# Altium PCB power_adapter_icarus.PcbDoc
Units mil, origin at the board's own origin, x right, y up, seen from the top; angles counter-clockwise.
Board outline 5250 x 2929.55 mil, 2 copper layers (Top Layer, Bottom Layer); 38 components, 8 nets, 120 pads, 4 vias.
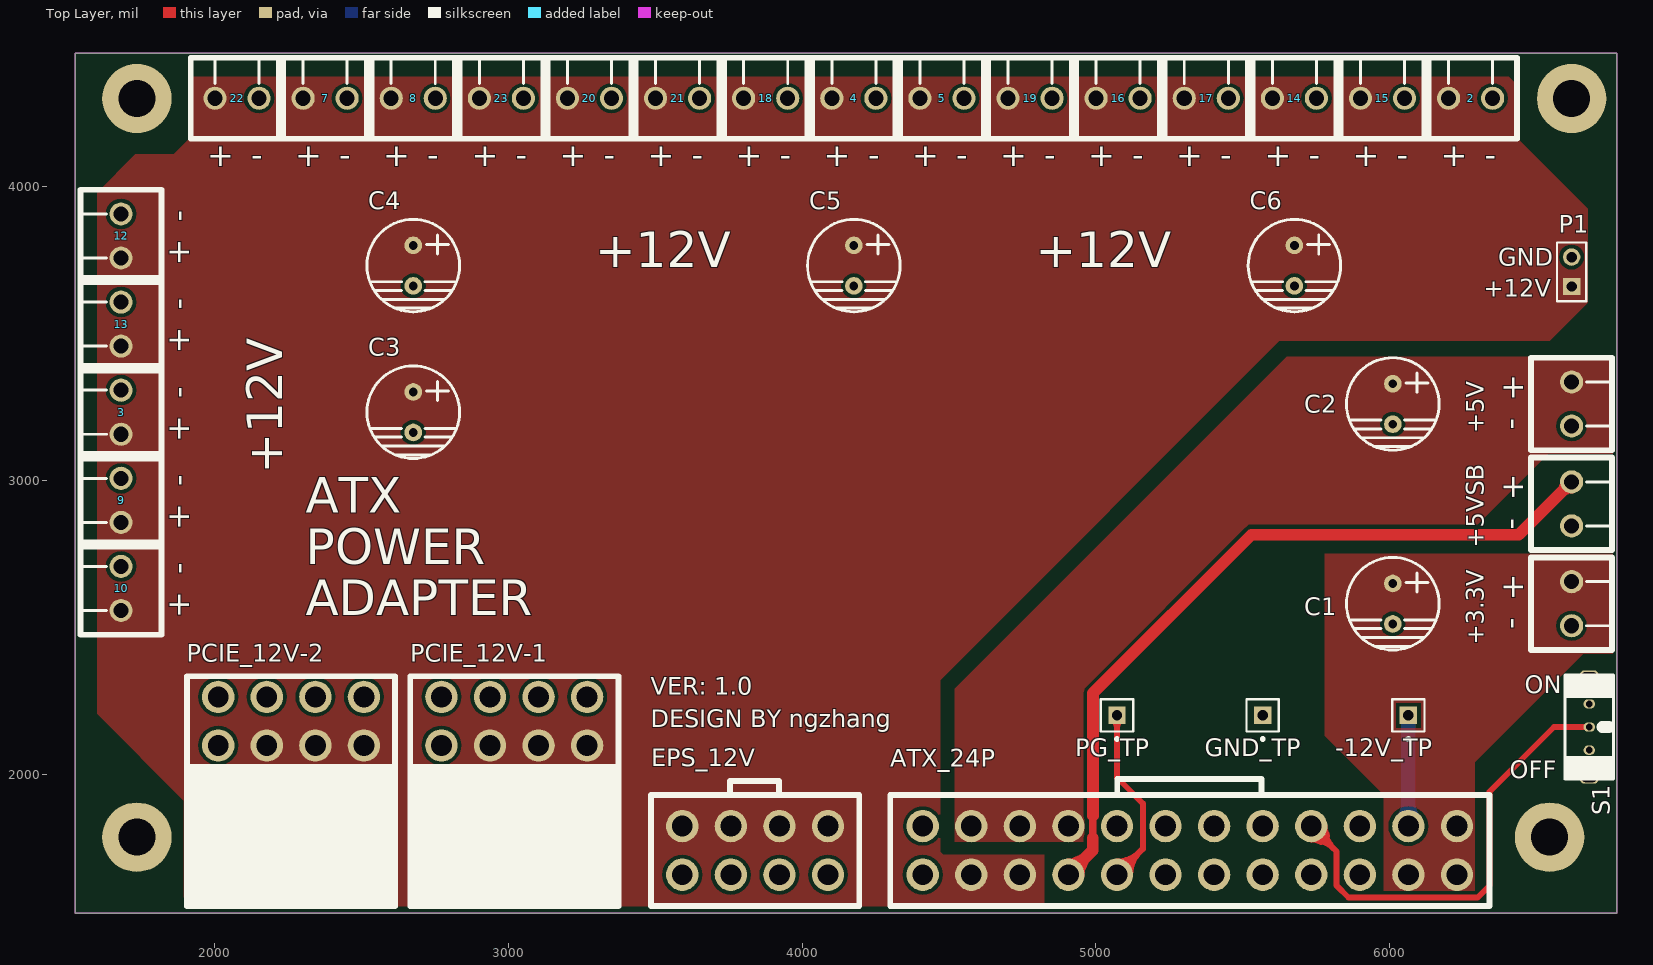
[diagram p0: Top Layer view]
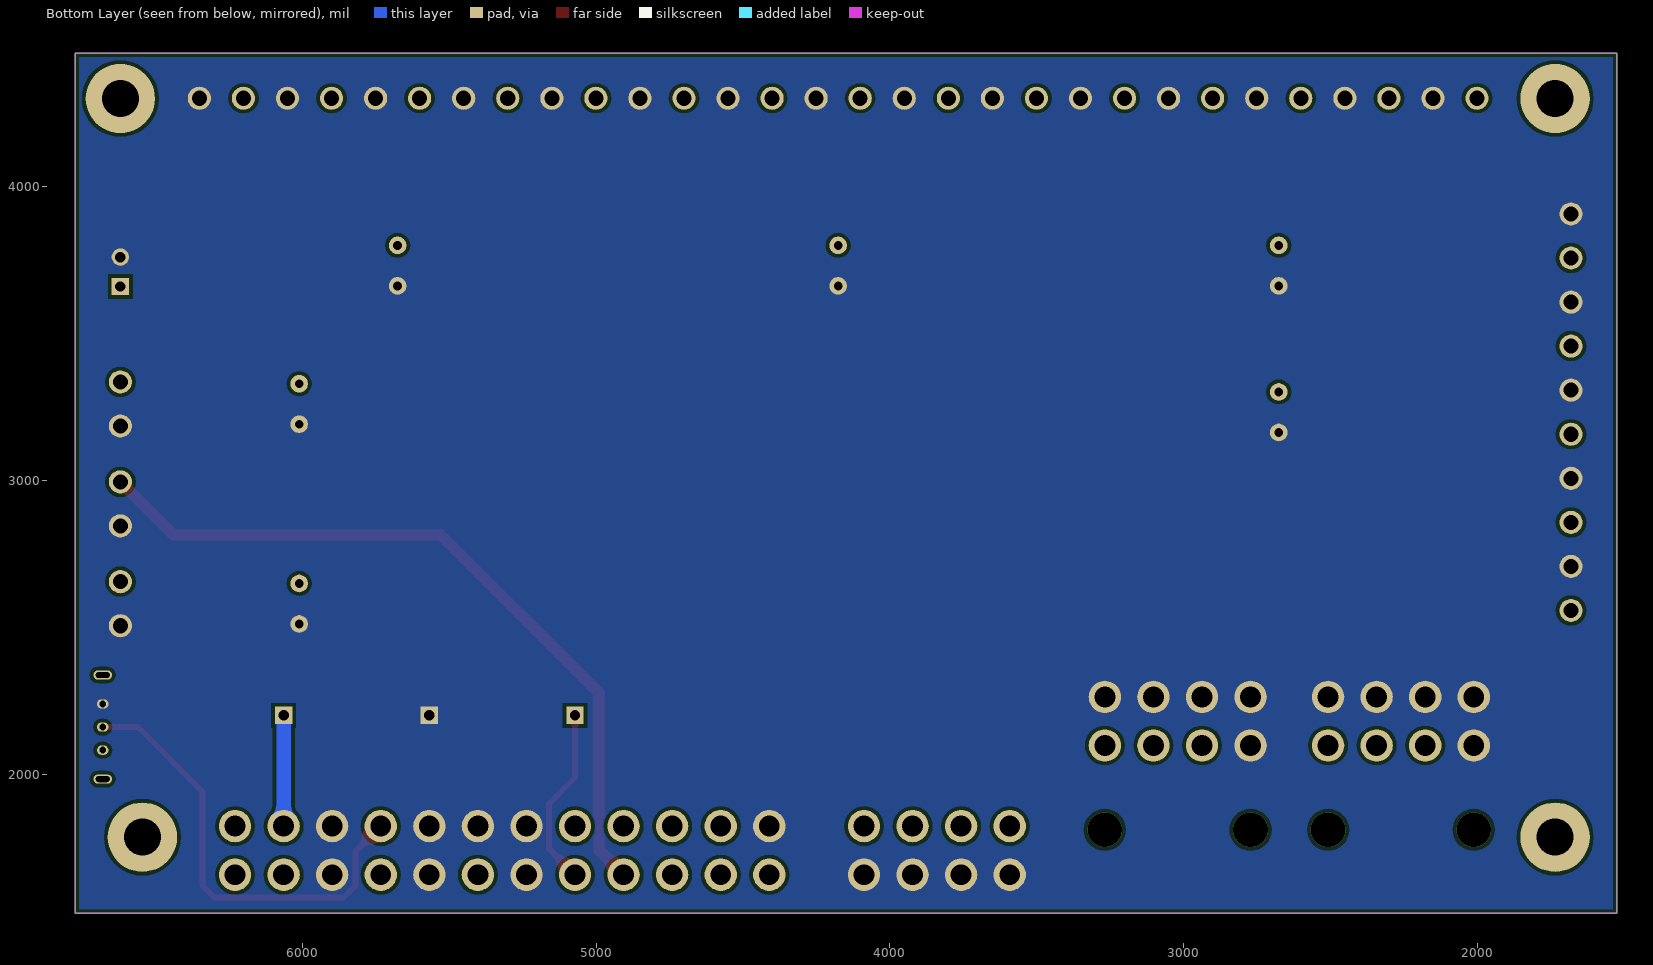
[diagram p1: Bottom Layer view, seen from below]

## Layer stack, top to bottom
Top Layer: signal copper 1.4
Dielectric: dielectric 12.6, FR-4, Dk 4.8
Bottom Layer: signal copper 1.4

## Board outline
1524.39,1525.45 1524.39,4455 6774.39,4455 6774.39,1525.45

## Design rules (kind name [scope] priority, off if disabled: settings)
Clearance [All] p1: gap=12
ComponentClearance [All] p1 off: gap=10 collisioncheckmode=3 verticalgap=10 showdistances=FALSE
HoleSize [All] p1: absolutevalues=TRUE maxlimit=10000 minlimit=1 maxpercent=80.000 minpercent=20.000
PlaneConnect [All] p1: planeconnectstyle=Direct reliefexpansion=20 reliefentries=4 reliefconductorwidth=10 reliefairgap=10
PolygonConnect [All] p1: connectstyle=Direct reliefconductorwidth=10 reliefentries=4 polygonreliefangle="90 Angle"
RoutingVias [All] p1: holewidth=28 width=50 viastyle="Through Hole" minholewidth=28 minwidth=50 maxholewidth=2800 maxwidth=5000
SilkscreenOverComponentPads [All] p1: minsilkscreentomaskgap=10
SolderMaskExpansion [All] p1: expansion=4
Width [All] p1: maxlimit=1000 minlimit=10 preferedwidth=10 minimp=50.000000 maximp=50.000000 favimp=50.000000
24 further rules are at their usual default settings.

## Components (designator, comment, footprint, x,y, rotation, side; value= is the part's Value field where it differs from the comment)
2 "Header 2" EU_2PIN 6276,4301 r0 top
3 "Header 2" EU_2PIN 1681,3232 r90 top
4 "Header 2" EU_2PIN 4176,4301 r0 top
5 "Header 2" EU_2PIN 4476,4301 r0 top
7 "Header 2" EU_2PIN 2376,4301 r0 top
8 "Header 2" EU_2PIN 2676,4301 r0 top
9 "Header 2" EU_2PIN 1681,2932 r90 top
10 "Header 2" EU_2PIN 1681,2632 r90 top
12 "Header 2" EU_2PIN 1681,3832 r90 top
13 "Header 2" EU_2PIN 1681,3532 r90 top
14 "Header 2" EU_2PIN 5676,4301 r0 top
15 "Header 2" EU_2PIN 5976,4301 r0 top
16 "Header 2" EU_2PIN 5076,4301 r0 top
17 "Header 2" EU_2PIN 5376,4301 r0 top
18 "Header 2" EU_2PIN 3876,4301 r0 top
19 "Header 2" EU_2PIN 4776,4301 r0 top
20 "Header 2" EU_2PIN 3276,4301 r0 top
21 "Header 2" EU_2PIN 3576,4301 r0 top
22 "Header 2" EU_2PIN 2076,4301 r0 top
23 "Header 2" EU_2PIN 2976,4301 r0 top
+3.3V "Header 2" EU_2PIN 6620,2580 r270 top
+5V "Header 2" EU_2PIN 6620,3260 r270 top
+5VSB "Header 2" EU_2PIN 6620,2920 r270 top
-12V_TP "Socket" PIN1 6064.09,2200 r180 top
ATX_24P "P1" ATX_24P 5320,1740 r180 top locked
C1 "270uF/16V" CAP8X8 6011,2508.9 r0 top
C2 "270uF/16V" CAP8X8 6011,3188.9 r0 top
C3 "270uF/16V" CAP8X8 2676,3160.9 r0 top
C4 "270uF/16V" CAP8X8 2676,3660 r0 top
C5 "270uF/16V" CAP8X8 4176,3660 r0 top
C6 "270uF/16V" CAP8X8 5676,3660 r0 top
EPS_12V "P4" EPS_12V 3840,1740 r0 top
GND_TP "Socket" PIN1 5568.03,2200 r180 top
P1 "12V_TP" HDR1X2 6620,3660 r90 top
PCIE_12V-1 "P3" PCIE_12V 3020,2180 r0 top
PCIE_12V-2 "P2" PCIE_12V 2260,2180 r0 top
PG_TP "Socket" PIN1 5071.97,2200 r180 top
S1 "SW-SPDT" SW3_S 6680,2160 r270 top

## Footprints (in the part's own frame and the unit in brackets; to place one, negate y for a bottom-side part, rotate by r counter-clockwise, add the part's x,y. Pads: shape width x height; smd on the part's side, far side on the other; paste and mask are expansions set on the pad)
ATX_24P [mm]
  round 2.8 hole 1.8: 1(-23.1,2.1) 2(-18.9,2.1) 3(-14.7,2.1) 4(-10.5,2.1) 5(-6.3,2.1) 6(-2.1,2.1) 7(2.1,2.1) 8(6.3,2.1) 9(10.5,2.1) 10(14.7,2.1) 11(18.9,2.1) 12(23.1,2.1) 13(-23.1,-2.1) 14(-18.9,-2.1) 15(-14.7,-2.1) 16(-10.5,-2.1) 17(-6.3,-2.1) 18(-2.1,-2.1) 19(2.1,-2.1) 20(6.3,-2.1) 21(10.5,-2.1) 22(14.7,-2.1) 23(18.9,-2.1) 24(23.1,-2.1)
  silkscreen extent -25.91,-6.17 25.91,4.8
CAP8X8 [mil]
  round 60 hole 30: 1(0,140) 2(0,2.2)
  silkscreen extent -157,-86 157,229
EPS_12V [mm]
  round 2.8 hole 1.8: 1(6.3,-2.1) 2(2.1,-2.1) 3(-2.1,-2.1) 4(-6.3,-2.1) 5(6.3,2.1) 6(2.1,2.1) 7(-2.1,2.1) 8(-6.3,2.1)
  silkscreen extent -9,-4.8 9,5.99
EU_2PIN [mm]
  round 2 hole 1.3: 1(-1.905,0) 2(1.905,0)
  silkscreen extent -4,-3.5 4,3.5
HDR1X2 [mm] "Connector; Header; 2 Position"
  rect 1.5x1.5 hole 0.9: 1(0,0)
  round 1.5 hole 0.9: 2(2.54,0)
  silkscreen extent -1.27,-1.27 3.81,1.27
PCIE_12V [mm]
  round 2.8 hole 1.8: 1(6.3,-2.1) 2(2.1,-2.1) 3(-2.1,-2.1) 4(-6.3,-2.1) 5(6.3,2.1) 6(2.1,2.1) 7(-2.1,2.1) 8(-6.3,2.1)
  silkscreen extent -9.05,-16 9,3.89
PIN1 [mm] "Connector; Plug"
  rect 1.5x1.5 hole 0.9: 1(0,0)
  silkscreen extent -1.4,-1.4 1.4,2.17
SW3_S [mm]
  oval 0.8x1 hole 0.6: 1(-2,0) 2(0,0) 3(2,0)
  oval 0.8x1.6 hole 0.5 slot 1.2 at 90 deg: 4(-4.5,0) 5(4.5,0)
  silkscreen extent -4.57,-2.21 4.57,2.18

## Part data
2 3 4 5 7 8 9 10 12 13 14 15 16 17 18 19 20 21 22 23 +3.3V +5V +5VSB: "Header, 2-Pin"
ATX_24P: library part ATX_24P
C1 C2 C3 C4 C5 C6: library part "Cap Pol3", "Polarized Capacitor (Surface Mount)"
EPS_12V: library part EPS_12V
P1: library part "Header 2", "Header, 2-Pin"
PCIE_12V-1 PCIE_12V-2: library part PCIE_12V
S1: "SPDT Subminiature Toggle Switch, Right Angle Mounting, Vertical Actuation"

## Free pads (board coordinates)
  round 236.22 hole 125.98: 0(1735,1785) 0(1735,4300) 0(6545,1785) 0(6620,4300)

## Via types
v1: diameter 118.11, hole 118.11, Top Layer to Bottom Layer, 4 vias

## Nets (pads, with @x,y where several pads share a name; then routed paths per layer and width w, separated by ;. In a path a pad name is that pad's centre, name@x,y a point inside that pad or via, vN(x,y) a via of type N, cw(c..) or ccw(c..) an arc to the next point about the centre after c; other vN are vias at no path point)
5VSB: +5VSB.1 ATX_24P.9 | length 3119.9
  Top Layer w25: 4989.29,1782.15 4989.29,1857.06
  Top Layer w40: ATX_24P.9@4901.83,1658.3 cw(c4958.09,1646.78) 4943.23,1702.25 ; ATX_24P.9 4989.29,1740 4989.29,1782.15 ; ATX_24P.9@4907.59,1652.54 ccw(c4896.07,1708.8) 4951.54,1693.94 ; 4990,1857.77 4990,2275 5530,2815 6440,2815 +5VSB.1 ; 4966.56,1717.27 cw(c4906.61,1777.22) 4906.61,1692.44 ccw(c4906.61,1777.22) 4966.56,1717.27 ; 4966.56,1717.27 ccw(c5026.52,1657.32) 4941.73,1657.32 cw(c5026.52,1657.32) 4966.56,1717.27 ; 6586.93,2961.93 cw(c6620,2928.87) 6620,2975.63 ccw(c6620,2928.87) 6586.93,2961.93 ; 6586.93,2961.93 ccw(c6553.87,2995) 6600.63,2995 cw(c6553.87,2995) 6586.93,2961.93
GND: 2.2 3.2 4.2 5.2 7.2 8.2 9.2 10.2 12.2 13.2 14.2 15.2 16.2 17.2 18.2 19.2 20.2 21.2 22.2 23.2 +3.3V.2 +5V.2 +5VSB.2 ATX_24P.3 ATX_24P.5 ATX_24P.7 ATX_24P.15 ATX_24P.17 ATX_24P.18 ATX_24P.19 ATX_24P.24 C1.2 C2.2 C3.2 C4.2 C5.2 C6.2 EPS_12V.1 EPS_12V.2 EPS_12V.3 EPS_12V.4 GND_TP.1 P1.2 PCIE_12V-1.4 PCIE_12V-1.5 PCIE_12V-1.6 PCIE_12V-1.7 PCIE_12V-1.8 PCIE_12V-2.4 PCIE_12V-2.5 PCIE_12V-2.6 PCIE_12V-2.7 PCIE_12V-2.8 S1.1
Net-12V_TP_1: -12V_TP.1 ATX_24P.14 | length 605.8
  Bottom Layer w50: ATX_24P.14 -12V_TP.1 ; 6064.09,1895.39 cw(c5991.38,1895.39) 6042.8,1843.97 ccw(c5991.38,1895.39) 6064.09,1895.39 ; 6064.09,1895.39 ccw(c6136.81,1895.39) 6085.39,1843.97 cw(c6136.81,1895.39) 6064.09,1895.39
NetATX_24P_8: ATX_24P.8 PG_TP.1 | length 956
  Top Layer w20: PG_TP.1@5058.16,2186.19 cw(c5024.83,2152.86) 5071.97,2152.86 cw(c5119.11,2152.86) PG_TP.1@5085.78,2186.19 ; ATX_24P.8 5160,1745.35 5160,1900 5071.97,1988.03 PG_TP.1 ; ATX_24P.8@5071.97,1682.44 ccw(c5071.97,1743.08) 5114.85,1700.2 ccw(c5157.73,1657.32) ATX_24P.8@5097.09,1657.32 ; ATX_24P.8@5071.97,1702.44 ccw(c5071.97,1811.37) 5148.99,1734.34 ccw(c5226.01,1657.32) ATX_24P.8@5117.09,1657.32
PSON#: ATX_24P.16 S1.2 | length 2223.4
  Top Layer w20: ATX_24P.16@5718.81,1819.69 ccw(c5784.26,1833.09) 5766.97,1768.56 ; ATX_24P.16 5820,1736.06 5820,1620 5860,1580 6300,1580 6340,1620 6340,1940 6560,2160 S1.2 ; ATX_24P.16@5736.37,1837.26 cw(c5722.97,1771.8) 5787.5,1789.1 ; 5776.27,1779.8 cw(c5819.14,1822.68) 5758.5,1822.68 ccw(c5819.14,1822.68) 5776.27,1779.8 ; 5776.27,1779.8 ccw(c5733.39,1736.92) 5733.39,1797.56 cw(c5733.39,1736.92) 5776.27,1779.8 ; 5810.41,1745.66 cw(c5887.43,1822.68) 5778.5,1822.68 ccw(c5887.43,1822.68) 5810.41,1745.66 ; 5810.41,1745.66 ccw(c5733.39,1668.63) 5733.39,1777.56 cw(c5733.39,1668.63) 5810.41,1745.66
VCC3V3: +3.3V.1 ATX_24P.1 ATX_24P.2 ATX_24P.13 C1.1
VCC5V: +5V.1 ATX_24P.21 ATX_24P.22 ATX_24P.23 C2.1
VCC12V: 2.1 3.1 4.1 5.1 7.1 8.1 9.1 10.1 12.1 13.1 14.1 15.1 16.1 17.1 18.1 19.1 20.1 21.1 22.1 23.1 ATX_24P.10 ATX_24P.11 C3.1 C4.1 C5.1 C6.1 EPS_12V.5 EPS_12V.6 EPS_12V.7 EPS_12V.8 P1.1 PCIE_12V-1.1 PCIE_12V-1.2 PCIE_12V-1.3 PCIE_12V-2.1 PCIE_12V-2.2 PCIE_12V-2.3
pads on no net: ATX_24P.4 ATX_24P.6 ATX_24P.12 ATX_24P.20 S1.3 S1.4 S1.5
copper on no net:
  other v1: 2011.97,1809.92 2508.03,1809.92 2771.97,1809.92 3268.03,1809.92

## Polygon pours and split planes (outlines as drawn)
VCC12V on Top Layer "VCC12V" (solid, pour order 6): 4825,1725 4825,1550 3490,1550 1925,1550 1895,1580 1895,1910 1600,2205 1600,3980 1730,4110 1860,4110 1910,4160 1910,4360 1925,4375 6405,4375 6435,4345 6435,4165 6495,4105 6675,3925 6675,3605 6545,3475 5625,3475 4470,2320 4470,1920 4470,1735 4480,1725 4825,1725
VCC5V on Top Layer "VCC5V" (solid, pour order 4): 4520,1770 4960,1770 4960,2290 4990,2320 5520,2850 6220,2850 6300,2850 6450,3000 6540,3090 6774.39,3090 6774.39,3420 6480,3420 5650,3420 4520,2290 4520,1770
VCC3V3 on Top Layer "VCC3V3" (solid, pour order 2): 5980,1600 5980,1930 5830,2080 5780,2130 5780,2750 6774.39,2750 6774.39,2410 6660,2410 6300,2050 6290,2040 6290,1600 5980,1600
GND on Bottom Layer "GND" (solid, pour order 8): 1524.39,4455 1524.39,1525.45 6774.39,1525.45 6774.39,4455 1524.39,4455

## Keep-outs
Keep-Out Layer:
  lines w5: 1524.39,1525.45 3706.48,1525.45 6774.39,1525.45 6774.39,4455 1524.39,4455 1524.39,1525.45

## Silkscreen, mask and mechanical layers (free items; w line width, h text height)
Top Overlay:
  text "GND" at 6370,3730 h60
  text "+12V" at 3295.52,3725 h120
  text "+12V" at 4795.52,3725 h120
  text "+12V" at 6320,3625 h60
  text "+12V" at 2230,3022.07 h120 r90
  text "ATX" at 2310,2890 h120
  text "POWER" at 2310,2715 h120
  text "ADAPTER" at 2310,2540 h120
  text "ON" at 6460,2275 h60
  text "VER: 1.0" at 3485,2270 h60
  text "DESIGN BY ngzhang" at 3485,2160 h60
  text "OFF" at 6410,1985 h60

## Text inside footprints (layer, text, board x,y; h text height)
2: Top Overlay "+" at 6174.34,4069 h80; Top Overlay "-" at 6324.34,4069 h80
3: Top Overlay "+" at 1913,3130.34 h80 r90; Top Overlay "-" at 1913,3280.34 h80 r90
4: Top Overlay "+" at 4074.34,4069 h80; Top Overlay "-" at 4224.34,4069 h80
5: Top Overlay "+" at 4374.34,4069 h80; Top Overlay "-" at 4524.34,4069 h80
7: Top Overlay "+" at 2274.34,4069 h80; Top Overlay "-" at 2424.34,4069 h80
8: Top Overlay "+" at 2574.34,4069 h80; Top Overlay "-" at 2724.34,4069 h80
9: Top Overlay "+" at 1913,2830.34 h80 r90; Top Overlay "-" at 1913,2980.34 h80 r90
10: Top Overlay "+" at 1913,2530.34 h80 r90; Top Overlay "-" at 1913,2680.34 h80 r90
12: Top Overlay "+" at 1913,3730.34 h80 r90; Top Overlay "-" at 1913,3880.34 h80 r90
13: Top Overlay "+" at 1913,3430.34 h80 r90; Top Overlay "-" at 1913,3580.34 h80 r90
14: Top Overlay "+" at 5574.34,4069 h80; Top Overlay "-" at 5724.34,4069 h80
15: Top Overlay "+" at 5874.34,4069 h80; Top Overlay "-" at 6024.34,4069 h80
16: Top Overlay "+" at 4974.34,4069 h80; Top Overlay "-" at 5124.34,4069 h80
17: Top Overlay "+" at 5274.34,4069 h80; Top Overlay "-" at 5424.34,4069 h80
18: Top Overlay "+" at 3774.34,4069 h80; Top Overlay "-" at 3924.34,4069 h80
19: Top Overlay "+" at 4674.34,4069 h80; Top Overlay "-" at 4824.34,4069 h80
20: Top Overlay "+" at 3174.34,4069 h80; Top Overlay "-" at 3324.34,4069 h80
21: Top Overlay "+" at 3474.34,4069 h80; Top Overlay "-" at 3624.34,4069 h80
22: Top Overlay "+" at 1974.34,4069 h80; Top Overlay "-" at 2124.34,4069 h80
23: Top Overlay "+" at 2874.34,4069 h80; Top Overlay "-" at 3024.34,4069 h80
+3.3V: Top Overlay "+" at 6388,2681.66 h80 r270; Top Overlay "-" at 6388,2531.66 h80 r270
+5V: Top Overlay "+" at 6388,3361.66 h80 r270; Top Overlay "-" at 6388,3211.66 h80 r270
+5VSB: Top Overlay "+" at 6388,3021.66 h80 r270; Top Overlay "-" at 6388,2871.66 h80 r270